# Altium PCB pay-optical-testing.PcbDoc (part 2 of 2)
Units mil, origin at the board's own origin, x right, y up, seen from the top; angles counter-clockwise.
Board outline 6000 x 4000 mil, 2 copper layers (Top Layer, Bottom Layer); 469 components, 250 nets, 1335 pads, 34 vias.
Unrouted connection lines stored in the file: 1082.
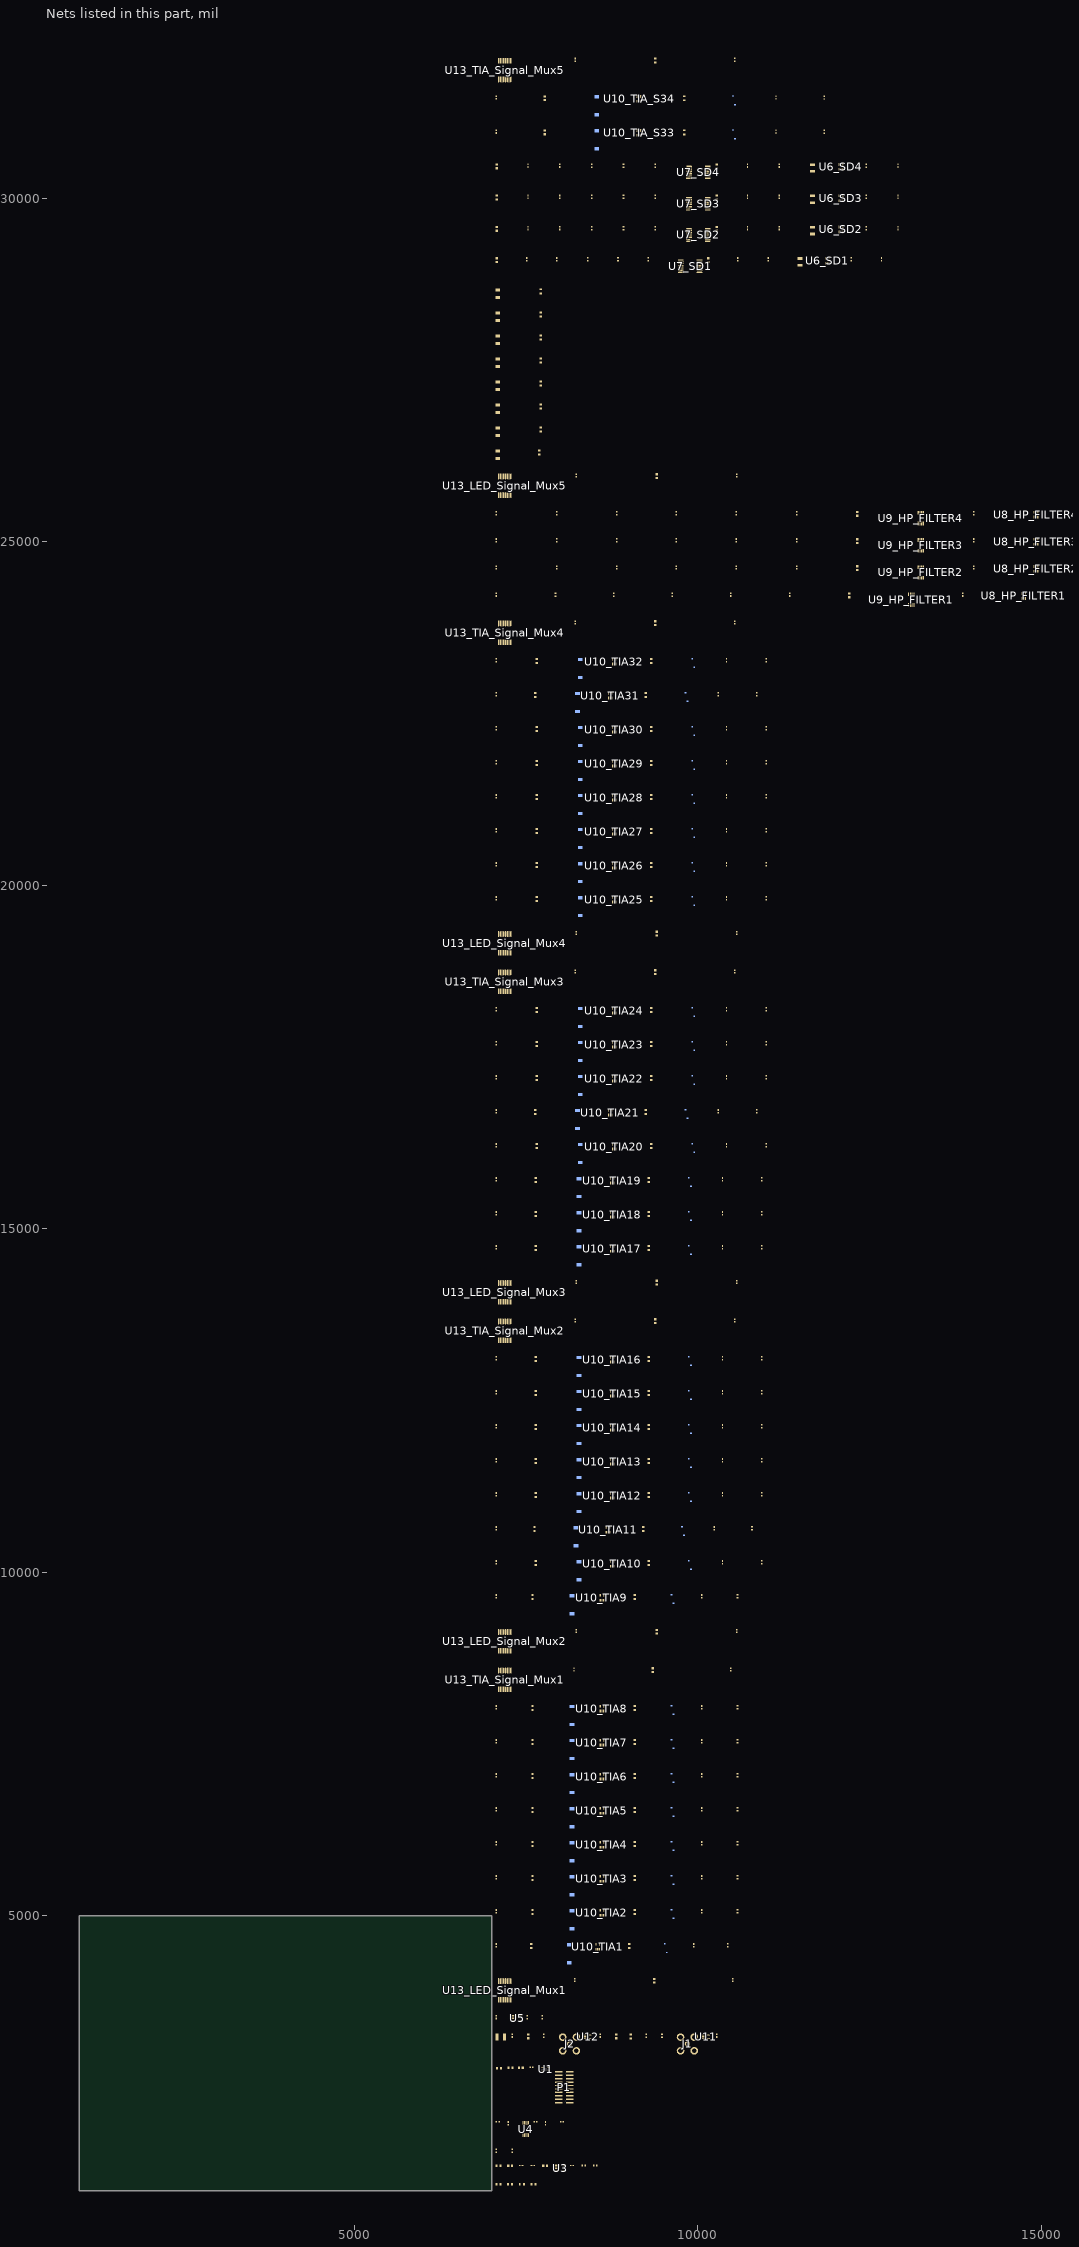
[diagram p2: the nets of this part, all layers, seen from the top]

## Components (designator, comment, footprint, x,y, rotation, side; value= is the part's Value field where it differs from the comment) (continued)
U6_SD3 "AD8613" SOP-65P200X125-5N 12060,29965 r90 top (schematic designator U6)
U6_SD4 "AD8613" SOP-65P200X125-5N 12060,30420 r90 top (schematic designator U6)
U7_SD1 "ADA2200" SSOP16_N 9890,29010 r0 top (schematic designator U7)
U7_SD2 "ADA2200" SSOP16_N 10010,29465 r0 top (schematic designator U7)
U7_SD3 "ADA2200" SSOP16_N 10010,29920 r0 top (schematic designator U7)
U7_SD4 "ADA2200" SSOP16_N 10010,30375 r0 top (schematic designator U7)
U8_HP_FILTER1 "AD8613" SOP-65P200X125-5N 14720,24175 r90 top (schematic designator U8)
U8_HP_FILTER2 "AD8613" SOP-65P200X125-5N 14900,24570 r90 top (schematic designator U8)
U8_HP_FILTER3 "AD8613" SOP-65P200X125-5N 14900,24965 r90 top (schematic designator U8)
U8_HP_FILTER4 "AD8613" SOP-65P200X125-5N 14900,25360 r90 top (schematic designator U8)
U9_HP_FILTER1 "AD8227" SOP8-65P300X300-8N 13070,24080 r90 top (schematic designator U9)
U9_HP_FILTER2 "AD8227" SOP8-65P300X300-8N 13210,24475 r90 top (schematic designator U9)
U9_HP_FILTER3 "AD8227" SOP8-65P300X300-8N 13210,24870 r90 top (schematic designator U9)
U9_HP_FILTER4 "AD8227" SOP8-65P300X300-8N 13210,25265 r90 top (schematic designator U9)
U10_TIA1 "AD8605" SOP-65P200X125-5N 8520,4515 r90 top (schematic designator U10)
U10_TIA2 "AD8605" SOP-65P200X125-5N 8580,5010 r90 top (schematic designator U10)
U10_TIA3 "AD8605" SOP-65P200X125-5N 8580,5505 r90 top (schematic designator U10)
U10_TIA4 "AD8605" SOP-65P200X125-5N 8580,6000 r90 top (schematic designator U10)
U10_TIA5 "AD8605" SOP-65P200X125-5N 8580,6495 r90 top (schematic designator U10)
U10_TIA6 "AD8605" SOP-65P200X125-5N 8580,6990 r90 top (schematic designator U10)
U10_TIA7 "AD8605" SOP-65P200X125-5N 8580,7485 r90 top (schematic designator U10)
U10_TIA8 "AD8605" SOP-65P200X125-5N 8580,7980 r90 top (schematic designator U10)
U10_TIA9 "AD8605" SOP-65P200X125-5N 8580,9595 r90 top (schematic designator U10)
U10_TIA10 "AD8605" SOP-65P200X125-5N 8730,10090 r90 top (schematic designator U10)
U10_TIA11 "AD8605" SOP-65P200X125-5N 8670,10585 r90 top (schematic designator U10)
U10_TIA12 "AD8605" SOP-65P200X125-5N 8730,11080 r90 top (schematic designator U10)
U10_TIA13 "AD8605" SOP-65P200X125-5N 8730,11575 r90 top (schematic designator U10)
U10_TIA14 "AD8605" SOP-65P200X125-5N 8730,12070 r90 top (schematic designator U10)
U10_TIA15 "AD8605" SOP-65P200X125-5N 8730,12565 r90 top (schematic designator U10)
U10_TIA16 "AD8605" SOP-65P200X125-5N 8730,13060 r90 top (schematic designator U10)
U10_TIA17 "AD8605" SOP-65P200X125-5N 8730,14675 r90 top (schematic designator U10)
U10_TIA18 "AD8605" SOP-65P200X125-5N 8730,15170 r90 top (schematic designator U10)
U10_TIA19 "AD8605" SOP-65P200X125-5N 8730,15665 r90 top (schematic designator U10)
U10_TIA20 "AD8605" SOP-65P200X125-5N 8760,16160 r90 top (schematic designator U10)
U10_TIA21 "AD8605" SOP-65P200X125-5N 8700,16655 r90 top (schematic designator U10)
U10_TIA22 "AD8605" SOP-65P200X125-5N 8760,17150 r90 top (schematic designator U10)
U10_TIA23 "AD8605" SOP-65P200X125-5N 8760,17645 r90 top (schematic designator U10)
U10_TIA24 "AD8605" SOP-65P200X125-5N 8760,18140 r90 top (schematic designator U10)
U10_TIA25 "AD8605" SOP-65P200X125-5N 8760,19755 r90 top (schematic designator U10)
U10_TIA26 "AD8605" SOP-65P200X125-5N 8760,20250 r90 top (schematic designator U10)
U10_TIA27 "AD8605" SOP-65P200X125-5N 8760,20745 r90 top (schematic designator U10)
U10_TIA28 "AD8605" SOP-65P200X125-5N 8760,21240 r90 top (schematic designator U10)
U10_TIA29 "AD8605" SOP-65P200X125-5N 8760,21735 r90 top (schematic designator U10)
U10_TIA30 "AD8605" SOP-65P200X125-5N 8760,22230 r90 top (schematic designator U10)
U10_TIA31 "AD8605" SOP-65P200X125-5N 8700,22725 r90 top (schematic designator U10)
U10_TIA32 "AD8605" SOP-65P200X125-5N 8760,23220 r90 top (schematic designator U10)
U10_TIA_S33 "AD8605" SOP-65P200X125-5N 9120,30915 r90 top (schematic designator U10)
U10_TIA_S34 "AD8605" SOP-65P200X125-5N 9120,31410 r90 top (schematic designator U10)
U11 "AD8605" SOP-65P200X125-5N 10085,3265 r0 top
U12 "AD8605" SOP-65P200X125-5N 8365,3265 r0 top
U13_LED_Signal_Mux1 "ADG658" SSOP16_N 7190,3915 r90 top (schematic designator U13)
U13_LED_Signal_Mux2 "ADG658" SSOP16_N 7190,8995 r90 top (schematic designator U13)
U13_LED_Signal_Mux3 "ADG658" SSOP16_N 7190,14075 r90 top (schematic designator U13)
U13_LED_Signal_Mux4 "ADG658" SSOP16_N 7190,19155 r90 top (schematic designator U13)
U13_LED_Signal_Mux5 "ADG658" SSOP16_N 7190,25815 r90 top (schematic designator U13)
U13_TIA_Signal_Mux1 "ADG658" SSOP16_N 7190,8435 r90 top (schematic designator U13)
U13_TIA_Signal_Mux2 "ADG658" SSOP16_N 7190,13515 r90 top (schematic designator U13)
U13_TIA_Signal_Mux3 "ADG658" SSOP16_N 7190,18595 r90 top (schematic designator U13)
U13_TIA_Signal_Mux4 "ADG658" SSOP16_N 7190,23675 r90 top (schematic designator U13)
U13_TIA_Signal_Mux5 "ADG658" SSOP16_N 7190,31865 r90 top (schematic designator U13)
Y1_SD1 "32.768kHz" ABS07-120-32.768 11490,29075 r90 top (schematic designator Y1)
Y1_SD2 "32.768kHz" ABS07-120-32.768 11670,29530 r90 top (schematic designator Y1)
Y1_SD3 "32.768kHz" ABS07-120-32.768 11670,29985 r90 top (schematic designator Y1)
Y1_SD4 "32.768kHz" ABS07-120-32.768 11670,30440 r90 top (schematic designator Y1)

## Footprints (in the part's own frame and the unit in brackets; to place one, negate y for a bottom-side part, rotate by r counter-clockwise, add the part's x,y. Pads: shape width x height; smd on the part's side, far side on the other; paste and mask are expansions set on the pad)
14-1210 [mm] "Chip Resistor, Body 3.2x2.5mm, IPC High Density"
  rect 1.1x2.6 smd: 1(-1.35,0) 2(1.35,0)
  silkscreen extent -0.4,-1.2 0.4,1.2, body extent -1.68,-1.32 1.68,1.32, height 0.9
0402#1 [mm] "Chip Capacitor, Body 1.0x0.5mm, IPC High Density"
  rect 0.6x0.5 smd: 1(-0.5,0) 2(0.5,0)
  body extent -0.55,-0.3 0.55,0.3, height 1.3
0402#2 [mm] "0402 Resistor"
  rect 0.55x0.6 smd: 1(-0.525,0) 2(0.525,0)
  silkscreen extent -0.08,-0.22 0.07,0.23
0603-LED [mm]
  rect 0.7x0.9 smd: 1(-0.75,0) 2(0.75,0)
  silkscreen extent -1.32,-0.67 1.5,0.67, body extent -0.85,-0.48 0.85,0.48, height 0.9
1608[0603] [mm] "Chip Capacitor, Body 1.6x0.8mm, IPC High Density"
  rect 0.8x0.9 smd: 1(-0.7,0) 2(0.7,0)
  body extent -0.87,-0.48 0.87,0.48, height 1.3
ABS07-120-32.768 [mm] "32.768 kHz crystal"
  rect 1x1.8 smd: 1(-1.25,0) 2(1.25,0)
  silkscreen extent -0.43,-0.86 0.43,0.86
C1206 [mm] "Chip Capacitor, Body 3.2x1.6mm, IPC High Density"
  rect 1.1x1.7 smd: 1(-1.35,0) 2(1.35,0)
  silkscreen extent -0.4,-0.75 0.4,0.75, body extent -1.7,-0.9 1.7,0.9, height 1.3
CON20_2X10_DUA00 [mil]
  rect 20x110 smd: 1(225,-80) 2(225,80) 3(175,-80) 4(175,80) 5(125,-80) 6(125,80) 7(75,-80) 8(75,80) 9(25,-80) 10(25,80) 11(-25,-80) 12(-25,80) 13(-75,-80) 14(-75,80) 15(-125,-80) 16(-125,80) 17(-175,-80) 18(-175,80) 19(-225,-80) 20(-225,80)
  round 38 / inner round 60 / far side round 38 hole 38: 21(-200,0) 22(200,0)
  silkscreen extent -255,-200 255,73, body extent 0,0 10,10, height 10
DFN220X250X80-7N [mil]
  rect 32x12 smd: 1(-45,26) 2(-45,0) 3(-45,-26) 4(45,-26) 5(45,0) 6(45,26)
  rect 30x47 smd: ""(0,0)
  silkscreen extent -86,18 -70,34
J1-0603 [mm] "Chip Resistor, Body 1.6x0.8mm, IPC High Density"
  rect 0.7x0.9 smd: 1(-0.75,0) 2(0.75,0)
  silkscreen extent -0.2,-0.35 0.2,0.35, body extent -0.85,-0.48 0.85,0.48, height 0.9
"LB P4SG" [mm] "Footprint for a reverse-mount Osram LED"
  rect 0.5x0.7 smd far side mask+0.102: 1(-1.6,-0.375) 2(1.6,0.375)
MCX5.08-H5 [mm] "Coaxial, through hole, straight."
  round 2 hole 1.2: 1(-0.002,-0.009)
  round 2.8 hole 1.7: 2(2.538,-2.549) 3(2.538,2.531) 4(-2.542,2.531) 5(-2.542,-2.549)
  silkscreen extent -3,-3.01 3,2.99
SOP8-65P300X300-8N [mm]
  rect 1.35x0.45 smd: 1(0,0) 2(0,-0.65) 3(0,-1.3) 4(0,-1.95) 5(3.95,-1.95) 6(3.95,-1.3) 7(3.95,-0.65) 8(3.95,0)
  silkscreen extent 0,-2.28 2.9,0.58
SOP10-50P300X300-10N [mm]
  rect 1.45x0.3 smd: 1(0,0) 2(0,-0.5) 3(0,-1) 4(0,-1.5) 5(0,-2) 6(4.4,-2) 7(4.4,-1.5) 8(4.4,-1) 9(4.4,-0.5) 10(4.4,0)
  silkscreen extent -0.15,-2.25 3.38,0.81
SOP-65P200X125-5N [mm]
  rect 1x0.47 smd: 1(0,0) 2(0,-0.65) 3(0,-1.3) 4(1.8,-1.3) 5(1.8,0)
  silkscreen extent -0.42,-1.85 1.8,0.57
SOT-23-5_95P290X160-5N [mm]
  rect 1.1x0.6 smd: 1(0,0) 2(0,-0.95) 3(0,-1.9) 4(2.8,-1.9) 5(2.8,0)
  silkscreen extent -0.99,-2.16 1.96,0.25
SSOP16_N [mm] "SOP, 16-Leads, Body 6.2x5.3mm, Pitch 0.65mm, IPC Medium Density"
  oval 2.1x0.45 smd: 1(-3.45,2.275) 2(-3.45,1.625) 3(-3.45,0.975) 4(-3.45,0.325) 5(-3.45,-0.325) 6(-3.45,-0.975) 7(-3.45,-1.625) 8(-3.45,-2.275) 9(3.45,-2.275) 10(3.45,-1.625) 11(3.45,-0.975) 12(3.45,-0.325) 13(3.45,0.325) 14(3.45,0.975) 15(3.45,1.625) 16(3.45,2.275)
  silkscreen extent -3.57,-3.25 2,3.25, body extent -2.7,-3.25 2.7,3.25, height 2
VBPW34SR [mm] "Silicon PIN photodiode"
  rect 1.25x1.8 smd far side: 1(-3.325,0) 2(3.325,0)
  Keep-Out Layer board cut-out: -2.25,2 2.25,2 2.25,-2 -2.25,-2

## Part data
C1 C2 C3 C4 C5 C6 C7 C8 C12_LPF_N1 C12_LPF_N2 C12_LPF_N3 C12_LPF_N4 C12_LPF_P5 C12_LPF_P6 C12_LPF_P7 C12_LPF_P8 C13 C14_SD1 C14_SD2 C14_SD3 C14_SD4 C15_SD1 C15_SD2 C15_SD3 C15_SD4 C16_SD1 C16_SD2 C16_SD3 C16_SD4 C17_SD1 C17_SD2 C17_SD3 C17_SD4 C18_SD1 C18_SD2 C18_SD3 C18_SD4 C19_SD1 C19_SD2 C19_SD3 C19_SD4 C20_SD1 C20_SD2 C20_SD3 C20_SD4 C21_HP_FILTER1 C21_HP_FILTER2 C21_HP_FILTER3 C21_HP_FILTER4 C22_HP_FILTER1 C22_HP_FILTER2 C22_HP_FILTER3 C22_HP_FILTER4 C23_HP_FILTER1 C23_HP_FILTER2 C23_HP_FILTER3 C23_HP_FILTER4 C24_HP_FILTER1 C24_HP_FILTER2 C24_HP_FILTER3 C24_HP_FILTER4 C25_HP_FILTER1 C25_HP_FILTER2 C25_HP_FILTER3 C25_HP_FILTER4 C27_TIA1 C27_TIA2 C27_TIA3 C27_TIA4 C27_TIA5 C27_TIA6 C27_TIA7 C27_TIA8 C27_TIA9 C27_TIA10 C27_TIA11 C27_TIA12 C27_TIA13 C27_TIA14 C27_TIA15 C27_TIA16 C27_TIA17 C27_TIA18 C27_TIA19 C27_TIA20 C27_TIA21 C27_TIA22 C27_TIA23 C27_TIA24 C27_TIA25 C27_TIA26 C27_TIA27 C27_TIA28 C27_TIA29 C27_TIA30 C27_TIA31 C27_TIA32 C27_TIA_S33 C27_TIA_S34 C28_TIA1 C28_TIA2 C28_TIA3 C28_TIA4 C28_TIA5 C28_TIA6 C28_TIA7 C28_TIA8 C28_TIA9 C28_TIA10 C28_TIA11 C28_TIA12 C28_TIA13 C28_TIA14 C28_TIA15 C28_TIA16 C28_TIA17 C28_TIA18 C28_TIA19 C28_TIA20 C28_TIA21 C28_TIA22 C28_TIA23 C28_TIA24 C28_TIA25 C28_TIA26 C28_TIA27 C28_TIA28 C28_TIA29 C28_TIA30 C28_TIA31 C28_TIA32 C28_TIA_S33 C28_TIA_S34 C29 C30 C31 C32 C33 C34_LED_Signal_Mux1 C34_LED_Signal_Mux2 C34_LED_Signal_Mux3 C34_LED_Signal_Mux4 C34_LED_Signal_Mux5 C34_TIA_Signal_Mux1 C34_TIA_Signal_Mux2 C34_TIA_Signal_Mux3 C34_TIA_Signal_Mux4 C34_TIA_Signal_Mux5 C35_LED_Signal_Mux1 C35_LED_Signal_Mux2 C35_LED_Signal_Mux3 C35_LED_Signal_Mux4 C35_LED_Signal_Mux5 C35_TIA_Signal_Mux1 C35_TIA_Signal_Mux2 C35_TIA_Signal_Mux3 C35_TIA_Signal_Mux4 C35_TIA_Signal_Mux5: library part "Cap Semi", "Capacitor (Semiconductor SIM Model)", LatestRevisionDate=29-May-2009, LatestRevisionNote="IPC-7351 Footprint Added.", PackageDescription="Chip Capacitor", PackageReference=C1206, Published=8-Jun-2000, Publisher="Altium Limited"
  C1 C2 C3 C4 C5 C6 C7 C8 C14_SD1 C14_SD2 C14_SD3 C14_SD4 C15_SD1 C15_SD2 C15_SD3 C15_SD4 C16_SD1 C16_SD2 C16_SD3 C16_SD4 C17_SD1 C17_SD2 C17_SD3 C17_SD4 C18_SD1 C18_SD2 C18_SD3 C18_SD4 C19_SD1 C19_SD2 C19_SD3 C19_SD4 C20_SD1 C20_SD2 C20_SD3 C20_SD4 C21_HP_FILTER1 C21_HP_FILTER2 C21_HP_FILTER3 C21_HP_FILTER4 C22_HP_FILTER1 C22_HP_FILTER2 C22_HP_FILTER3 C22_HP_FILTER4 C23_HP_FILTER1 C23_HP_FILTER2 C23_HP_FILTER3 C23_HP_FILTER4 C24_HP_FILTER1 C24_HP_FILTER2 C24_HP_FILTER3 C24_HP_FILTER4 C25_HP_FILTER1 C25_HP_FILTER2 C25_HP_FILTER3 C25_HP_FILTER4 C27_TIA1 C27_TIA2 C27_TIA3 C27_TIA4 C27_TIA5 C27_TIA6 C27_TIA7 C27_TIA8 C27_TIA9 C27_TIA10 C27_TIA11 C27_TIA12 C27_TIA13 C27_TIA14 C27_TIA15 C27_TIA16 C27_TIA17 C27_TIA18 C27_TIA19 C27_TIA20 C27_TIA21 C27_TIA22 C27_TIA23 C27_TIA24 C27_TIA25 C27_TIA26 C27_TIA27 C27_TIA28 C27_TIA29 C27_TIA30 C27_TIA31 C27_TIA32 C27_TIA_S33 C27_TIA_S34 C28_TIA1 C28_TIA2 C28_TIA3 C28_TIA4 C28_TIA5 C28_TIA6 C28_TIA7 C28_TIA8 C28_TIA9 C28_TIA10 C28_TIA11 C28_TIA12 C28_TIA13 C28_TIA14 C28_TIA15 C28_TIA16 C28_TIA17 C28_TIA18 C28_TIA19 C28_TIA20 C28_TIA21 C28_TIA22 C28_TIA23 C28_TIA24 C28_TIA25 C28_TIA26 C28_TIA27 C28_TIA28 C28_TIA29 C28_TIA30 C28_TIA31 C28_TIA32 C28_TIA_S33 C28_TIA_S34 C29 C30 C31 C32 C33 C34_LED_Signal_Mux1 C34_LED_Signal_Mux2 C34_LED_Signal_Mux3 C34_LED_Signal_Mux4 C34_LED_Signal_Mux5 C34_TIA_Signal_Mux1 C34_TIA_Signal_Mux2 C34_TIA_Signal_Mux3 C34_TIA_Signal_Mux4 C34_TIA_Signal_Mux5 C35_LED_Signal_Mux1 C35_LED_Signal_Mux2 C35_LED_Signal_Mux3 C35_LED_Signal_Mux4 C35_LED_Signal_Mux5 C35_TIA_Signal_Mux1 C35_TIA_Signal_Mux2 C35_TIA_Signal_Mux3 C35_TIA_Signal_Mux4 C35_TIA_Signal_Mux5: Supplier=Digi-Key, Supplier 1=Digi-Key
  C13: Supplier 1=Digi-Key
C9: library part "Cap Semi", "Capacitor (Semiconductor SIM Model)", Supplier Part Number=587-3807-1-ND, LatestRevisionDate=29-May-2009, LatestRevisionNote="IPC-7351 Footprint Added.", PackageDescription="Chip Capacitor", PackageReference=C1206, Published=8-Jun-2000, Publisher="Altium Limited", Supplier=Digi-Key, Supplier 1=Digi-Key
C10: library part "Cap Semi", "Capacitor (Semiconductor SIM Model)", Supplier Part Number=1276-1632-1-ND, LatestRevisionDate=29-May-2009, LatestRevisionNote="IPC-7351 Footprint Added.", PackageDescription="Chip Capacitor", PackageReference=C1206, Published=8-Jun-2000, Publisher="Altium Limited", Supplier=Digi-Key, Supplier 1=Digi-Key
C11: library part "Cap Semi", "Capacitor (Semiconductor SIM Model)", Supplier Part Number=1276-1972-1-ND, LatestRevisionDate=29-May-2009, LatestRevisionNote="IPC-7351 Footprint Added.", PackageDescription="Chip Capacitor", PackageReference=C1206, Published=8-Jun-2000, Publisher="Altium Limited", Supplier=Digi-Key, Supplier 1=Digi-Key
C26_TIA1 C26_TIA2 C26_TIA3 C26_TIA4 C26_TIA5 C26_TIA6 C26_TIA7 C26_TIA8 C26_TIA9 C26_TIA10 C26_TIA11 C26_TIA12 C26_TIA13 C26_TIA14 C26_TIA15 C26_TIA16 C26_TIA17 C26_TIA18 C26_TIA19 C26_TIA20 C26_TIA21 C26_TIA22 C26_TIA23 C26_TIA24 C26_TIA25 C26_TIA26 C26_TIA27 C26_TIA28 C26_TIA29 C26_TIA30 C26_TIA31 C26_TIA32 C26_TIA_S33 C26_TIA_S34: library part "Cap Semi", "Feedback capacitor", LatestRevisionDate=29-May-2009, LatestRevisionNote="IPC-7351 Footprint Added.", PackageDescription="Chip Capacitor", PackageReference=C1206, Published=8-Jun-2000, Publisher="Altium Limited", Supplier=Digi-Key, Supplier 1=Digi-Key
D1: library part LED2, "Typical RED, GREEN, YELLOW, AMBER GaAs LED", LatestRevisionDate=17-Jul-2002, LatestRevisionNote="Re-released for DXP Platform.", PackageDescription="SM LED; 2 Flat Leads", PackageReference=3.2X1.6X1.1, PackageVersion=Feb-2002, Published=8-Jun-2000, Publisher="Altium Limited", Supplier 1=Digi-Key
D2_TIA1 D2_TIA2 D2_TIA3 D2_TIA4 D2_TIA5 D2_TIA6 D2_TIA7 D2_TIA8 D2_TIA9 D2_TIA10 D2_TIA11 D2_TIA12 D2_TIA13 D2_TIA14 D2_TIA15 D2_TIA16 D2_TIA17 D2_TIA18 D2_TIA19 D2_TIA20 D2_TIA21 D2_TIA22 D2_TIA23 D2_TIA24 D2_TIA25 D2_TIA26 D2_TIA27 D2_TIA28 D2_TIA29 D2_TIA30 D2_TIA31 D2_TIA32 D2_TIA_S33 D2_TIA_S34: library part LED2, "Typical RED, GREEN, YELLOW, AMBER GaAs LED", Supplier Part Number=475-2814-1-ND, LatestRevisionDate=17-Jul-2002, LatestRevisionNote="Re-released for DXP Platform.", PackageDescription="SM LED; 2 Flat Leads", PackageReference=3.2X1.6X1.1, PackageVersion=Feb-2002, Published=8-Jun-2000, Publisher="Altium Limited", Supplier=Digi-Key, Supplier 1=Digi-Key
D3_TIA1 D3_TIA2 D3_TIA3 D3_TIA4 D3_TIA5 D3_TIA6 D3_TIA7 D3_TIA8 D3_TIA9 D3_TIA10 D3_TIA11 D3_TIA12 D3_TIA13 D3_TIA14 D3_TIA15 D3_TIA16 D3_TIA17 D3_TIA18 D3_TIA19 D3_TIA20 D3_TIA21 D3_TIA22 D3_TIA23 D3_TIA24 D3_TIA25 D3_TIA26 D3_TIA27 D3_TIA28 D3_TIA29 D3_TIA30 D3_TIA31 D3_TIA32 D3_TIA_S33 D3_TIA_S34: library part "Photo Sen", "Photosensitive Diode", Supplier Part Number=751-1501-1-ND, LatestRevisionDate=17-Jul-2002, LatestRevisionNote="Re-released for DXP Platform.", PackageReference=PIN2, Published=24-Mar-1999, Publisher="Altium Limited", Supplier=Digi-Key, Supplier 1=Digi-Key
J1 J2: "RF Coaxial PCB Connector, MCX; Thru-Hole, Right-Angle Mount Socket, Blunt Post Terminal, 50 Ohm Impedance", PackageDocument=04-Jul-1999, ComponentLink1Description="Manufacturer Link", ComponentLink1URL=http://www.amphenolrf.com/, DatasheetDocument=30-May-2003, DrillSize="Corresponds to nominal value.", LatestRevisionDate=15-Jul-2004, LatestRevisionNote="Component Replaced.", PackageReference=919-119J-51AX, PCB_Layout="Complies with manufacturer's recommendation.", Published=15-Jul-2004, Publisher="Altium Limited", Supplier 1=Digi-Key
P1: library part "Header 10X2", "10x2 SMD 50mil Incoming from SSM", Supplier Part Number 1=SAM11274-ND, LatestRevisionDate=17-Jul-2002, LatestRevisionNote="Re-released for DXP Platform.", Publisher="Altium Limited", Supplier 1=Digi-Key
R1: library part Res3, "Power indication LED", LatestRevisionDate=29-May-2009, LatestRevisionNote="IPC-7351 Footprint Added.", PackageDescription="Chip Resistor", PackageReference=J1-0603, Published=8-Jun-2000, Publisher="Altium Limited", Supplier 1=Digi-Key
R2: library part Res3, "10K pull-up for MUX ENn pin", LatestRevisionDate=29-May-2009, LatestRevisionNote="IPC-7351 Footprint Added.", PackageDescription="Chip Resistor", PackageReference=J1-0603, Published=8-Jun-2000, Publisher="Altium Limited"
R3 R4 R5: library part Res3, "10K pulldown on MUX channel selection", LatestRevisionDate=29-May-2009, LatestRevisionNote="IPC-7351 Footprint Added.", PackageDescription="Chip Resistor", PackageReference=J1-0603, Published=8-Jun-2000, Publisher="Altium Limited"
R6 R7 R8 R9 R10_LPF_N1 R10_LPF_N2 R10_LPF_N3 R10_LPF_N4 R10_LPF_P5 R10_LPF_P6 R10_LPF_P7 R10_LPF_P8 R11 R12 R14_SD1 R14_SD2 R14_SD3 R14_SD4 R15_SD1 R15_SD2 R15_SD3 R15_SD4 R16_SD1 R16_SD2 R16_SD3 R16_SD4 R17_HP_FILTER1 R17_HP_FILTER2 R17_HP_FILTER3 R17_HP_FILTER4 R19_HP_FILTER1 R19_HP_FILTER2 R19_HP_FILTER3 R19_HP_FILTER4 R20 R21 R22_TIA1 R22_TIA2 R22_TIA3 R22_TIA4 R22_TIA5 R22_TIA6 R22_TIA7 R22_TIA8 R22_TIA9 R22_TIA10 R22_TIA11 R22_TIA12 R22_TIA13 R22_TIA14 R22_TIA15 R22_TIA16 R22_TIA17 R22_TIA18 R22_TIA19 R22_TIA20 R22_TIA21 R22_TIA22 R22_TIA23 R22_TIA24 R22_TIA25 R22_TIA26 R22_TIA27 R22_TIA28 R22_TIA29 R22_TIA30 R22_TIA31 R22_TIA32 R22_TIA_S33 R22_TIA_S34 R24 R25 R26 R27 R28 R29_LED_Signal_Mux1 R29_LED_Signal_Mux2 R29_LED_Signal_Mux3 R29_LED_Signal_Mux4 R29_LED_Signal_Mux5 R29_TIA_Signal_Mux1 R29_TIA_Signal_Mux2 R29_TIA_Signal_Mux3 R29_TIA_Signal_Mux4 R29_TIA_Signal_Mux5: library part Res3, "Resistor", LatestRevisionDate=29-May-2009, LatestRevisionNote="IPC-7351 Footprint Added.", PackageDescription="Chip Resistor", PackageReference=J1-0603, Published=8-Jun-2000, Publisher="Altium Limited"
  R6 R7 R8 R9 R14_SD1 R14_SD2 R14_SD3 R14_SD4 R15_SD1 R15_SD2 R15_SD3 R15_SD4 R16_SD1 R16_SD2 R16_SD3 R16_SD4 R17_HP_FILTER1 R17_HP_FILTER2 R17_HP_FILTER3 R17_HP_FILTER4 R19_HP_FILTER1 R19_HP_FILTER2 R19_HP_FILTER3 R19_HP_FILTER4 R22_TIA1 R22_TIA2 R22_TIA3 R22_TIA4 R22_TIA5 R22_TIA6 R22_TIA7 R22_TIA8 R22_TIA9 R22_TIA10 R22_TIA11 R22_TIA12 R22_TIA13 R22_TIA14 R22_TIA15 R22_TIA16 R22_TIA17 R22_TIA18 R22_TIA19 R22_TIA20 R22_TIA21 R22_TIA22 R22_TIA23 R22_TIA24 R22_TIA25 R22_TIA26 R22_TIA27 R22_TIA28 R22_TIA29 R22_TIA30 R22_TIA31 R22_TIA32 R22_TIA_S33 R22_TIA_S34 R29_LED_Signal_Mux1 R29_LED_Signal_Mux2 R29_LED_Signal_Mux3 R29_LED_Signal_Mux4 R29_LED_Signal_Mux5 R29_TIA_Signal_Mux1 R29_TIA_Signal_Mux2 R29_TIA_Signal_Mux3 R29_TIA_Signal_Mux4 R29_TIA_Signal_Mux5: Supplier=Digi-Key, Supplier 1=Digi-Key
  R11 R12 R20 R21 R24 R25 R26 R27 R28: Supplier 1=Digi-Key
R13_SD1 R13_SD2 R13_SD3 R13_SD4: library part Res3, "Optional short to connect 32M1 rather than Y1", LatestRevisionDate=29-May-2009, LatestRevisionNote="IPC-7351 Footprint Added.", PackageDescription="Chip Resistor", PackageReference=J1-0603, Published=8-Jun-2000, Publisher="Altium Limited", Supplier=Digi-Key, Supplier 1=Digi-Key
R18_HP_FILTER1 R18_HP_FILTER2 R18_HP_FILTER3 R18_HP_FILTER4: library part Res3, "Optional resistor sets instrumentation amplifier gain", LatestRevisionDate=29-May-2009, LatestRevisionNote="IPC-7351 Footprint Added.", PackageDescription="Chip Resistor", PackageReference=J1-0603, Published=8-Jun-2000, Publisher="Altium Limited", Supplier 1=Digi-Key
R23_TIA1 R23_TIA2 R23_TIA3 R23_TIA4 R23_TIA5 R23_TIA6 R23_TIA7 R23_TIA8 R23_TIA9 R23_TIA10 R23_TIA11 R23_TIA12 R23_TIA13 R23_TIA14 R23_TIA15 R23_TIA16 R23_TIA17 R23_TIA18 R23_TIA19 R23_TIA20 R23_TIA21 R23_TIA22 R23_TIA23 R23_TIA24 R23_TIA25 R23_TIA26 R23_TIA27 R23_TIA28 R23_TIA29 R23_TIA30 R23_TIA31 R23_TIA32 R23_TIA_S33 R23_TIA_S34: library part Res3, "1 MOhm resistor for photodiode gain", LatestRevisionDate=29-May-2009, LatestRevisionNote="IPC-7351 Footprint Added.", PackageDescription="Chip Resistor", PackageReference=J1-0603, Published=8-Jun-2000, Publisher="Altium Limited", Supplier=Digi-Key, Supplier 1=Digi-Key
U1: "Low noise 3V low dropout regulator for analog and RF applications.", Supplier Part Number 1=296-44695-1-ND, Supplier 1=Digi-Key
U3: "2.5V reference voltage.", Supplier Part Number 1=ADR391AUJZREEL7CT-ND, Supplier=Digi-Key, Supplier 1=Digi-Key
U4: "12-bit, low-power, voltage-output DAC with internal reference.", Supplier Part Number 1=296-29022-1-ND, Supplier=Digi-Key, Supplier 1=Digi-Key
U5: "Open-drain output sub-microamp comparator.", Supplier Part Number 1=MCP6546T-E/OTCT-ND, Supplier 1=Digi-Key
U6_SD1 U6_SD2 U6_SD3 U6_SD4 U8_HP_FILTER1 U8_HP_FILTER2 U8_HP_FILTER3 U8_HP_FILTER4: "Low power, low noise rail-to-rail op-amp.", Supplier=Digi-Key, Supplier 1=Digi-Key
U7_SD1 U7_SD2 U7_SD3 U7_SD4: "Synchronous demodulator and configurable analog filter.", Supplier=Digi-Key, Supplier 1=Digi-Key
U9_HP_FILTER1 U9_HP_FILTER2 U9_HP_FILTER3 U9_HP_FILTER4: "Rail-to-rail instrumentation amplifier. Can operate on single supply.", Supplier Part Number 1=AD8227BRMZ-ND, Supplier=Digi-Key, Supplier 1=Digi-Key
U10_TIA1 U10_TIA2 U10_TIA3 U10_TIA4 U10_TIA5 U10_TIA6 U10_TIA7 U10_TIA8 U10_TIA9 U10_TIA10 U10_TIA11 U10_TIA12 U10_TIA13 U10_TIA14 U10_TIA15 U10_TIA16 U10_TIA17 U10_TIA18 U10_TIA19 U10_TIA20 U10_TIA21 U10_TIA22 U10_TIA23 U10_TIA24 U10_TIA25 U10_TIA26 U10_TIA27 U10_TIA28 U10_TIA29 U10_TIA30 U10_TIA31 U10_TIA32 U10_TIA_S33 U10_TIA_S34 U11 U12: "Low noise, precision rail-to-rail op-amp.", Supplier Part Number 1=AD8605ARTZREEL7CT-ND, Supplier=Digi-Key, Supplier 1=Digi-Key
U13_LED_Signal_Mux1 U13_LED_Signal_Mux2 U13_LED_Signal_Mux3 U13_LED_Signal_Mux4 U13_LED_Signal_Mux5 U13_TIA_Signal_Mux1 U13_TIA_Signal_Mux2 U13_TIA_Signal_Mux3 U13_TIA_Signal_Mux4 U13_TIA_Signal_Mux5: "Eight channel analog multiplexer.", Supplier Part Number 1=ADG658YRUZ-ND, Supplier=Digi-Key, Supplier 1=Digi-Key
Y1_SD1 Y1_SD2 Y1_SD3 Y1_SD4: library part XTAL, "Crystal Oscillator", Supplier Part Number=535-11937-1-ND, LatestRevisionDate=17-Jul-2002, LatestRevisionNote="Re-released for DXP Platform.", PackageDescription="Crystal, Thru-Hole; 2 Leads; Body 3.1 x 8.2 mm (Dia.xH)", PackageReference=R38, Published=8-Jun-2000, Publisher="Altium Limited", Supplier=Digi-Key, Supplier 1=Digi-Key

## Via types
v1: diameter 93, hole 82.68, Top Layer to Bottom Layer, 34 vias

## Nets (pads, with @x,y where several pads share a name; then routed paths per layer and width w, separated by ;. In a path a pad name is that pad's centre, name@x,y a point inside that pad or via, vN(x,y) a via of type N, cw(c..) or ccw(c..) an arc to the next point about the centre after c; other vN are vias at no path point)
3V: C1.2 C4.2 C5.2 C6.2 C7.2 C9.2 C10.2 C13.2 C16_SD1.2 C16_SD2.2 C16_SD3.2 C16_SD4.2 C17_SD1.2 C17_SD2.2 C17_SD3.2 C17_SD4.2 C18_SD1.1 C18_SD2.1 C18_SD3.1 C18_SD4.1 C19_SD1.2 C19_SD2.2 C19_SD3.2 C19_SD4.2 C22_HP_FILTER1.2 C22_HP_FILTER2.2 C22_HP_FILTER3.2 C22_HP_FILTER4.2 C23_HP_FILTER1.2 C23_HP_FILTER2.2 C23_HP_FILTER3.2 C23_HP_FILTER4.2 C24_HP_FILTER1.2 C24_HP_FILTER2.2 C24_HP_FILTER3.2 C24_HP_FILTER4.2 C27_TIA1.2 C27_TIA2.2 C27_TIA3.2 C27_TIA4.2 C27_TIA5.2 C27_TIA6.2 C27_TIA7.2 C27_TIA8.2 C27_TIA9.2 C27_TIA10.2 C27_TIA11.2 C27_TIA12.2 C27_TIA13.2 C27_TIA14.2 C27_TIA15.2 C27_TIA16.2 C27_TIA17.2 C27_TIA18.2 C27_TIA19.2 C27_TIA20.2 C27_TIA21.2 C27_TIA22.2 C27_TIA23.2 C27_TIA24.2 C27_TIA25.2 C27_TIA26.2 C27_TIA27.2 C27_TIA28.2 C27_TIA29.2 C27_TIA30.2 C27_TIA31.2 C27_TIA32.2 C27_TIA_S33.2 C27_TIA_S34.2 C28_TIA1.2 C28_TIA2.2 C28_TIA3.2 C28_TIA4.2 C28_TIA5.2 C28_TIA6.2 C28_TIA7.2 C28_TIA8.2 C28_TIA9.2 C28_TIA10.2 C28_TIA11.2 C28_TIA12.2 C28_TIA13.2 C28_TIA14.2 C28_TIA15.2 C28_TIA16.2 C28_TIA17.2 C28_TIA18.2 C28_TIA19.2 C28_TIA20.2 C28_TIA21.2 C28_TIA22.2 C28_TIA23.2 C28_TIA24.2 C28_TIA25.2 C28_TIA26.2 C28_TIA27.2 C28_TIA28.2 C28_TIA29.2 C28_TIA30.2 C28_TIA31.2 C28_TIA32.2 C28_TIA_S33.2 C28_TIA_S34.2 C30.2 C31.2 C32.2 C33.2 C34_LED_Signal_Mux1.2 C34_LED_Signal_Mux2.2 C34_LED_Signal_Mux3.2 C34_LED_Signal_Mux4.2 C34_LED_Signal_Mux5.2 C34_TIA_Signal_Mux1.2 C34_TIA_Signal_Mux2.2 C34_TIA_Signal_Mux3.2 C34_TIA_Signal_Mux4.2 C34_TIA_Signal_Mux5.2 C35_LED_Signal_Mux1.2 C35_LED_Signal_Mux2.2 C35_LED_Signal_Mux3.2 C35_LED_Signal_Mux4.2 C35_LED_Signal_Mux5.2 C35_TIA_Signal_Mux1.2 C35_TIA_Signal_Mux2.2 C35_TIA_Signal_Mux3.2 C35_TIA_Signal_Mux4.2 C35_TIA_Signal_Mux5.2 R2.2 R8.2 R9.2 R11.2 R12.2 R14_SD1.1 R14_SD2.1 R14_SD3.1 R14_SD4.1 R15_SD1.2 R15_SD2.2 R15_SD3.2 R15_SD4.2 R16_SD1.2 R16_SD2.2 R16_SD3.2 R16_SD4.2 R29_LED_Signal_Mux1.2 R29_LED_Signal_Mux2.2 R29_LED_Signal_Mux3.2 R29_LED_Signal_Mux4.2 R29_LED_Signal_Mux5.2 R29_TIA_Signal_Mux1.2 R29_TIA_Signal_Mux2.2 R29_TIA_Signal_Mux3.2 R29_TIA_Signal_Mux4.2 R29_TIA_Signal_Mux5.2 U1.1 U3.1 U3.2 U4.9 U5.5 U6_SD1.5 U6_SD2.5 U6_SD3.5 U6_SD4.5 U7_SD1.12 U7_SD2.12 U7_SD3.12 U7_SD4.12 U8_HP_FILTER1.5 U8_HP_FILTER2.5 U8_HP_FILTER3.5 U8_HP_FILTER4.5 U9_HP_FILTER1.8 U9_HP_FILTER2.8 U9_HP_FILTER3.8 U9_HP_FILTER4.8 U10_TIA1.5 U10_TIA2.5 U10_TIA3.5 U10_TIA4.5 U10_TIA5.5 U10_TIA6.5 U10_TIA7.5 U10_TIA8.5 U10_TIA9.5 U10_TIA10.5 U10_TIA11.5 U10_TIA12.5 U10_TIA13.5 U10_TIA14.5 U10_TIA15.5 U10_TIA16.5 U10_TIA17.5 U10_TIA18.5 U10_TIA19.5 U10_TIA20.5 U10_TIA21.5 U10_TIA22.5 U10_TIA23.5 U10_TIA24.5 U10_TIA25.5 U10_TIA26.5 U10_TIA27.5 U10_TIA28.5 U10_TIA29.5 U10_TIA30.5 U10_TIA31.5 U10_TIA32.5 U10_TIA_S33.5 U10_TIA_S34.5 U11.5 U12.5 U13_LED_Signal_Mux1.16 U13_LED_Signal_Mux2.16 U13_LED_Signal_Mux3.16 U13_LED_Signal_Mux4.16 U13_LED_Signal_Mux5.16 U13_TIA_Signal_Mux1.16 U13_TIA_Signal_Mux2.16 U13_TIA_Signal_Mux3.16 U13_TIA_Signal_Mux4.16 U13_TIA_Signal_Mux5.16
3V3: C2.2 C3.2 P1.1 P1.20 R1.2 R6.2 R7.2 U1.6
ADC_CSn_1: P1.14 R6.1
ADC_SYNCn_1: P1.16 R7.1
AGND: C3.1 C4.1 C5.1 C6.1 C7.1 C8.1 C27_TIA1.1 C27_TIA2.1 C27_TIA3.1 C27_TIA4.1 C27_TIA5.1 C27_TIA6.1 C27_TIA7.1 C27_TIA8.1 C27_TIA9.1 C27_TIA10.1 C27_TIA11.1 C27_TIA12.1 C27_TIA13.1 C27_TIA14.1 C27_TIA15.1 C27_TIA16.1 C27_TIA17.1 C27_TIA18.1 C27_TIA19.1 C27_TIA20.1 C27_TIA21.1 C27_TIA22.1 C27_TIA23.1 C27_TIA24.1 C27_TIA25.1 C27_TIA26.1 C27_TIA27.1 C27_TIA28.1 C27_TIA29.1 C27_TIA30.1 C27_TIA31.1 C27_TIA32.1 C27_TIA_S33.1 C27_TIA_S34.1 C28_TIA1.1 C28_TIA2.1 C28_TIA3.1 C28_TIA4.1 C28_TIA5.1 C28_TIA6.1 C28_TIA7.1 C28_TIA8.1 C28_TIA9.1 C28_TIA10.1 C28_TIA11.1 C28_TIA12.1 C28_TIA13.1 C28_TIA14.1 C28_TIA15.1 C28_TIA16.1 C28_TIA17.1 C28_TIA18.1 C28_TIA19.1 C28_TIA20.1 C28_TIA21.1 C28_TIA22.1 C28_TIA23.1 C28_TIA24.1 C28_TIA25.1 C28_TIA26.1 C28_TIA27.1 C28_TIA28.1 C28_TIA29.1 C28_TIA30.1 C28_TIA31.1 C28_TIA32.1 C28_TIA_S33.1 C28_TIA_S34.1 D2_TIA1.2 D2_TIA2.2 D2_TIA3.2 D2_TIA4.2 D2_TIA5.2 D2_TIA6.2 D2_TIA7.2 D2_TIA8.2 D2_TIA9.2 D2_TIA10.2 D2_TIA11.2 D2_TIA12.2 D2_TIA13.2 D2_TIA14.2 D2_TIA15.2 D2_TIA16.2 D2_TIA17.2 D2_TIA18.2 D2_TIA19.2 D2_TIA20.2 D2_TIA21.2 D2_TIA22.2 D2_TIA23.2 D2_TIA24.2 D2_TIA25.2 D2_TIA26.2 D2_TIA27.2 D2_TIA28.2 D2_TIA29.2 D2_TIA30.2 D2_TIA31.2 D2_TIA32.2 D2_TIA_S33.2 D2_TIA_S34.2 D3_TIA1.1 D3_TIA2.1 D3_TIA3.1 D3_TIA4.1 D3_TIA5.1 D3_TIA6.1 D3_TIA7.1 D3_TIA8.1 D3_TIA9.1 D3_TIA10.1 D3_TIA11.1 D3_TIA12.1 D3_TIA13.1 D3_TIA14.1 D3_TIA15.1 D3_TIA16.1 D3_TIA17.1 D3_TIA18.1 D3_TIA19.1 D3_TIA20.1 D3_TIA21.1 D3_TIA22.1 D3_TIA23.1 D3_TIA24.1 D3_TIA25.1 D3_TIA26.1 D3_TIA27.1 D3_TIA28.1 D3_TIA29.1 D3_TIA30.1 D3_TIA31.1 D3_TIA32.1 D3_TIA_S33.1 D3_TIA_S34.1 U3.5 U10_TIA1.2 U10_TIA1.3 U10_TIA2.2 U10_TIA2.3 U10_TIA3.2 U10_TIA3.3 U10_TIA4.2 U10_TIA4.3 U10_TIA5.2 U10_TIA5.3 U10_TIA6.2 U10_TIA6.3 U10_TIA7.2 U10_TIA7.3 U10_TIA8.2 U10_TIA8.3 U10_TIA9.2 U10_TIA9.3 U10_TIA10.2 U10_TIA10.3 U10_TIA11.2 U10_TIA11.3 U10_TIA12.2 U10_TIA12.3 U10_TIA13.2 U10_TIA13.3 U10_TIA14.2 U10_TIA14.3 U10_TIA15.2 U10_TIA15.3 U10_TIA16.2 U10_TIA16.3 U10_TIA17.2 U10_TIA17.3 U10_TIA18.2 U10_TIA18.3 U10_TIA19.2 U10_TIA19.3 U10_TIA20.2 U10_TIA20.3 U10_TIA21.2 U10_TIA21.3 U10_TIA22.2 U10_TIA22.3 U10_TIA23.2 U10_TIA23.3 U10_TIA24.2 U10_TIA24.3 U10_TIA25.2 U10_TIA25.3 U10_TIA26.2 U10_TIA26.3 U10_TIA27.2 U10_TIA27.3 U10_TIA28.2 U10_TIA28.3 U10_TIA29.2 U10_TIA29.3 U10_TIA30.2 U10_TIA30.3 U10_TIA31.2 U10_TIA31.3 U10_TIA32.2 U10_TIA32.3 U10_TIA_S33.2 U10_TIA_S33.3 U10_TIA_S34.2 U10_TIA_S34.3
AIN1/P3: R2.1 R29_LED_Signal_Mux1.1 R29_LED_Signal_Mux2.1 R29_LED_Signal_Mux3.1 R29_TIA_Signal_Mux1.1 R29_TIA_Signal_Mux2.1 R29_TIA_Signal_Mux3.1 U5.4 U13_LED_Signal_Mux1.6 U13_LED_Signal_Mux2.6 U13_LED_Signal_Mux3.6 U13_TIA_Signal_Mux1.6 U13_TIA_Signal_Mux2.6 U13_TIA_Signal_Mux3.6
AIN2/P2: R3.2 U13_LED_Signal_Mux1.9 U13_LED_Signal_Mux2.9 U13_LED_Signal_Mux3.9 U13_LED_Signal_Mux4.9 U13_LED_Signal_Mux5.9 U13_TIA_Signal_Mux1.9 U13_TIA_Signal_Mux2.9 U13_TIA_Signal_Mux3.9 U13_TIA_Signal_Mux4.9 U13_TIA_Signal_Mux5.9
AIN3/P1: R4.2 U13_LED_Signal_Mux1.10 U13_LED_Signal_Mux2.10 U13_LED_Signal_Mux3.10 U13_LED_Signal_Mux4.10 U13_LED_Signal_Mux5.10 U13_TIA_Signal_Mux1.10 U13_TIA_Signal_Mux2.10 U13_TIA_Signal_Mux3.10 U13_TIA_Signal_Mux4.10 U13_TIA_Signal_Mux5.10
AIN4/P0: R5.2 U13_LED_Signal_Mux1.11 U13_LED_Signal_Mux2.11 U13_LED_Signal_Mux3.11 U13_LED_Signal_Mux4.11 U13_LED_Signal_Mux5.11 U13_TIA_Signal_Mux1.11 U13_TIA_Signal_Mux2.11 U13_TIA_Signal_Mux3.11 U13_TIA_Signal_Mux4.11 U13_TIA_Signal_Mux5.11
AIN13: 
AIN14: 
AIN15: U4.1
AIN16: U4.2
CH4_ENn_6: R11.1 R29_LED_Signal_Mux4.1 R29_TIA_Signal_Mux4.1 U5.1 U13_LED_Signal_Mux4.6 U13_TIA_Signal_Mux4.6
DAC_CLRn: R9.1 U4.5
DAC_CSn_1: P1.12 R8.1 U4.6
FL_LED1_CH1: R22_TIA1.1 U13_LED_Signal_Mux1.13
FL_LED1_CH2: R22_TIA9.1 U13_LED_Signal_Mux2.13
FL_LED1_CH3: R22_TIA17.1 U13_LED_Signal_Mux3.13
FL_LED1_CH4: R22_TIA25.1 U13_LED_Signal_Mux4.13
FL_LED2_CH1: R22_TIA2.1 U13_LED_Signal_Mux1.14
FL_LED2_CH2: R22_TIA10.1 U13_LED_Signal_Mux2.14
FL_LED2_CH3: R22_TIA18.1 U13_LED_Signal_Mux3.14
FL_LED2_CH4: R22_TIA26.1 U13_LED_Signal_Mux4.14
FL_LED3_CH1: R22_TIA3.1 U13_LED_Signal_Mux1.15
FL_LED3_CH2: R22_TIA11.1 U13_LED_Signal_Mux2.15
FL_LED3_CH3: R22_TIA19.1 U13_LED_Signal_Mux3.15
FL_LED3_CH4: R22_TIA27.1 U13_LED_Signal_Mux4.15
FL_LED4_CH1: R22_TIA4.1 U13_LED_Signal_Mux1.12
FL_LED4_CH2: R22_TIA12.1 U13_LED_Signal_Mux2.12
FL_LED4_CH3: R22_TIA20.1 U13_LED_Signal_Mux3.12
FL_LED4_CH4: R22_TIA28.1 U13_LED_Signal_Mux4.12
FL_LED5_CH1: R22_TIA5.1 U13_LED_Signal_Mux1.1
FL_LED5_CH2: R22_TIA13.1 U13_LED_Signal_Mux2.1
FL_LED5_CH3: R22_TIA21.1 U13_LED_Signal_Mux3.1
FL_LED5_CH4: R22_TIA29.1 U13_LED_Signal_Mux4.1
FL_LED6_CH1: R22_TIA6.1 U13_LED_Signal_Mux1.5
FL_LED6_CH2: R22_TIA14.1 U13_LED_Signal_Mux2.5
FL_LED6_CH3: R22_TIA22.1 U13_LED_Signal_Mux3.5
FL_LED6_CH4: R22_TIA30.1 U13_LED_Signal_Mux4.5
FL_LED7_CH1: R22_TIA7.1 U13_LED_Signal_Mux1.2
FL_LED7_CH2: R22_TIA15.1 U13_LED_Signal_Mux2.2
FL_LED7_CH3: R22_TIA23.1 U13_LED_Signal_Mux3.2
FL_LED7_CH4: R22_TIA31.1 U13_LED_Signal_Mux4.2
FL_LED8_CH1: R22_TIA8.1 U13_LED_Signal_Mux1.4
FL_LED8_CH2: R22_TIA16.1 U13_LED_Signal_Mux2.4
FL_LED8_CH3: R22_TIA24.1 U13_LED_Signal_Mux3.4
FL_LED8_CH4: R22_TIA32.1 U13_LED_Signal_Mux4.4
GND: C1.1 C2.1 C9.1 C10.1 C11.2 C12_LPF_N1.1 C12_LPF_N2.1 C12_LPF_N3.1 C12_LPF_N4.1 C12_LPF_P5.1 C12_LPF_P6.1 C12_LPF_P7.1 C12_LPF_P8.1 C13.1 C14_SD1.2 C14_SD2.2 C14_SD3.2 C14_SD4.2 C15_SD1.2 C15_SD2.2 C15_SD3.2 C15_SD4.2 C16_SD1.1 C16_SD2.1 C16_SD3.1 C16_SD4.1 C17_SD1.1 C17_SD2.1 C17_SD3.1 C17_SD4.1 C18_SD1.2 C18_SD2.2 C18_SD3.2 C18_SD4.2 C19_SD1.1 C19_SD2.1 C19_SD3.1 C19_SD4.1 C20_SD1.1 C20_SD2.1 C20_SD3.1 C20_SD4.1 C22_HP_FILTER1.1 C22_HP_FILTER2.1 C22_HP_FILTER3.1 C22_HP_FILTER4.1 C23_HP_FILTER1.1 C23_HP_FILTER2.1 C23_HP_FILTER3.1 C23_HP_FILTER4.1 C24_HP_FILTER1.1 C24_HP_FILTER2.1 C24_HP_FILTER3.1 C24_HP_FILTER4.1 C25_HP_FILTER1.1 C25_HP_FILTER2.1 C25_HP_FILTER3.1 C25_HP_FILTER4.1 C29.2 C30.1 C31.1 C32.1 C33.1 C34_LED_Signal_Mux1.1 C34_LED_Signal_Mux2.1 C34_LED_Signal_Mux3.1 C34_LED_Signal_Mux4.1 C34_LED_Signal_Mux5.1 C34_TIA_Signal_Mux1.1 C34_TIA_Signal_Mux2.1 C34_TIA_Signal_Mux3.1 C34_TIA_Signal_Mux4.1 C34_TIA_Signal_Mux5.1 C35_LED_Signal_Mux1.1 C35_LED_Signal_Mux2.1 C35_LED_Signal_Mux3.1 C35_LED_Signal_Mux4.1 C35_LED_Signal_Mux5.1 C35_TIA_Signal_Mux1.1 C35_TIA_Signal_Mux2.1 C35_TIA_Signal_Mux3.1 C35_TIA_Signal_Mux4.1 C35_TIA_Signal_Mux5.1 D1.2 J1.2 J1.3 J1.4 J1.5 J2.2 J2.3 J2.4 J2.5 P1.2 P1.19 R3.1 R4.1 R5.1 R17_HP_FILTER1.1 R17_HP_FILTER2.1 R17_HP_FILTER3.1 R17_HP_FILTER4.1 R20.1 R21.1 R26.1 R28.1 U1.3 U1.4 U4.3 U4.4 U5.2 U6_SD1.2 U6_SD2.2 U6_SD3.2 U6_SD4.2 U7_SD1.5 U7_SD2.5 U7_SD3.5 U7_SD4.5 U8_HP_FILTER1.2 U8_HP_FILTER2.2 U8_HP_FILTER3.2 U8_HP_FILTER4.2 U9_HP_FILTER1.1 U9_HP_FILTER1.5 U9_HP_FILTER2.1 U9_HP_FILTER2.5 U9_HP_FILTER3.1 U9_HP_FILTER3.5 U9_HP_FILTER4.1 U9_HP_FILTER4.5 U11.2 U12.2 U13_LED_Signal_Mux1.7 U13_LED_Signal_Mux1.8 U13_LED_Signal_Mux2.7 U13_LED_Signal_Mux2.8 U13_LED_Signal_Mux3.7 U13_LED_Signal_Mux3.8 U13_LED_Signal_Mux4.7 U13_LED_Signal_Mux4.8 U13_LED_Signal_Mux5.7 U13_LED_Signal_Mux5.8 U13_TIA_Signal_Mux1.7 U13_TIA_Signal_Mux1.8 U13_TIA_Signal_Mux2.7 U13_TIA_Signal_Mux2.8 U13_TIA_Signal_Mux3.7 U13_TIA_Signal_Mux3.8 U13_TIA_Signal_Mux4.7 U13_TIA_Signal_Mux4.8 U13_TIA_Signal_Mux5.7 U13_TIA_Signal_Mux5.8
LED_Sig1: U6_SD1.1 U6_SD1.4 U13_LED_Signal_Mux1.3
LED_Sig2: U6_SD2.1 U6_SD2.4 U13_LED_Signal_Mux2.3
LED_Sig3: U6_SD3.1 U6_SD3.4 U13_LED_Signal_Mux3.3
LED_Sig4: U6_SD4.1 U6_SD4.4 U13_LED_Signal_Mux4.3 U13_LED_Signal_Mux5.3
LPF_N1: C12_LPF_N1.2 R10_LPF_N1.2
LPF_N2: C12_LPF_N2.2 R10_LPF_N2.2
LPF_N3: C12_LPF_N3.2 R10_LPF_N3.2
LPF_N4: C12_LPF_N4.2 R10_LPF_N4.2
LPF_P1: C12_LPF_P5.2 R10_LPF_P5.2
LPF_P2: C12_LPF_P6.2 R10_LPF_P6.2
LPF_P3: C12_LPF_P7.2 R10_LPF_P7.2
LPF_P4: C12_LPF_P8.2 R10_LPF_P8.2
MISO: P1.4
MOSI: P1.6 U4.8 U7_SD1.14 U7_SD2.14 U7_SD3.14 U7_SD4.14
MUX_5_EN_1: P1.10 R12.1 R29_LED_Signal_Mux5.1 R29_TIA_Signal_Mux5.1 U5.3 U13_LED_Signal_Mux5.6 U13_TIA_Signal_Mux5.6
NetC8_2: C8.2 U3.3 U3.4
NetC11_1: C11.1 U4.10
NetC14_SD1_1: C14_SD1.1 R13_SD1.1 U7_SD1.1 Y1_SD1.2
NetC14_SD2_1: C14_SD2.1 R13_SD2.1 U7_SD2.1 Y1_SD2.2
NetC14_SD3_1: C14_SD3.1 R13_SD3.1 U7_SD3.1 Y1_SD3.2
NetC14_SD4_1: C14_SD4.1 R13_SD4.1 U7_SD4.1 Y1_SD4.2
NetC15_SD1_1: C15_SD1.1 U7_SD1.16 Y1_SD1.1
NetC15_SD2_1: C15_SD2.1 U7_SD2.16 Y1_SD2.1
NetC15_SD3_1: C15_SD3.1 U7_SD3.16 Y1_SD3.1
NetC15_SD4_1: C15_SD4.1 U7_SD4.16 Y1_SD4.1
NetC21_HP_FILTER1_1: C21_HP_FILTER1.1 R17_HP_FILTER1.2 U9_HP_FILTER1.4
NetC21_HP_FILTER2_1: C21_HP_FILTER2.1 R17_HP_FILTER2.2 U9_HP_FILTER2.4
NetC21_HP_FILTER3_1: C21_HP_FILTER3.1 R17_HP_FILTER3.2 U9_HP_FILTER3.4
NetC21_HP_FILTER4_1: C21_HP_FILTER4.1 R17_HP_FILTER4.2 U9_HP_FILTER4.4
NetC26_TIA1_1: C26_TIA1.1 D3_TIA1.2 R23_TIA1.1 U10_TIA1.4
NetC26_TIA2_1: C26_TIA2.1 D3_TIA2.2 R23_TIA2.1 U10_TIA2.4
NetC26_TIA3_1: C26_TIA3.1 D3_TIA3.2 R23_TIA3.1 U10_TIA3.4
NetC26_TIA4_1: C26_TIA4.1 D3_TIA4.2 R23_TIA4.1 U10_TIA4.4
NetC26_TIA5_1: C26_TIA5.1 D3_TIA5.2 R23_TIA5.1 U10_TIA5.4
NetC26_TIA6_1: C26_TIA6.1 D3_TIA6.2 R23_TIA6.1 U10_TIA6.4
NetC26_TIA7_1: C26_TIA7.1 D3_TIA7.2 R23_TIA7.1 U10_TIA7.4
NetC26_TIA8_1: C26_TIA8.1 D3_TIA8.2 R23_TIA8.1 U10_TIA8.4
NetC26_TIA9_1: C26_TIA9.1 D3_TIA9.2 R23_TIA9.1 U10_TIA9.4
NetC26_TIA10_1: C26_TIA10.1 D3_TIA10.2 R23_TIA10.1 U10_TIA10.4
NetC26_TIA11_1: C26_TIA11.1 D3_TIA11.2 R23_TIA11.1 U10_TIA11.4
NetC26_TIA12_1: C26_TIA12.1 D3_TIA12.2 R23_TIA12.1 U10_TIA12.4
NetC26_TIA13_1: C26_TIA13.1 D3_TIA13.2 R23_TIA13.1 U10_TIA13.4
NetC26_TIA14_1: C26_TIA14.1 D3_TIA14.2 R23_TIA14.1 U10_TIA14.4
NetC26_TIA15_1: C26_TIA15.1 D3_TIA15.2 R23_TIA15.1 U10_TIA15.4
NetC26_TIA16_1: C26_TIA16.1 D3_TIA16.2 R23_TIA16.1 U10_TIA16.4
NetC26_TIA17_1: C26_TIA17.1 D3_TIA17.2 R23_TIA17.1 U10_TIA17.4
NetC26_TIA18_1: C26_TIA18.1 D3_TIA18.2 R23_TIA18.1 U10_TIA18.4
NetC26_TIA19_1: C26_TIA19.1 D3_TIA19.2 R23_TIA19.1 U10_TIA19.4
NetC26_TIA20_1: C26_TIA20.1 D3_TIA20.2 R23_TIA20.1 U10_TIA20.4
NetC26_TIA21_1: C26_TIA21.1 D3_TIA21.2 R23_TIA21.1 U10_TIA21.4
NetC26_TIA22_1: C26_TIA22.1 D3_TIA22.2 R23_TIA22.1 U10_TIA22.4
NetC26_TIA23_1: C26_TIA23.1 D3_TIA23.2 R23_TIA23.1 U10_TIA23.4
NetC26_TIA24_1: C26_TIA24.1 D3_TIA24.2 R23_TIA24.1 U10_TIA24.4
NetC26_TIA25_1: C26_TIA25.1 D3_TIA25.2 R23_TIA25.1 U10_TIA25.4
NetC26_TIA26_1: C26_TIA26.1 D3_TIA26.2 R23_TIA26.1 U10_TIA26.4
NetC26_TIA27_1: C26_TIA27.1 D3_TIA27.2 R23_TIA27.1 U10_TIA27.4
NetC26_TIA28_1: C26_TIA28.1 D3_TIA28.2 R23_TIA28.1 U10_TIA28.4
NetC26_TIA29_1: C26_TIA29.1 D3_TIA29.2 R23_TIA29.1 U10_TIA29.4
NetC26_TIA30_1: C26_TIA30.1 D3_TIA30.2 R23_TIA30.1 U10_TIA30.4
NetC26_TIA31_1: C26_TIA31.1 D3_TIA31.2 R23_TIA31.1 U10_TIA31.4
NetC26_TIA32_1: C26_TIA32.1 D3_TIA32.2 R23_TIA32.1 U10_TIA32.4
NetC26_TIA_S33_1: C26_TIA_S33.1 D3_TIA_S33.2 R23_TIA_S33.1 U10_TIA_S33.4
NetC26_TIA_S34_1: C26_TIA_S34.1 D3_TIA_S34.2 R23_TIA_S34.1 U10_TIA_S34.4
NetD1_1: D1.1 R1.1
NetD2_TIA1_1: D2_TIA1.1 R22_TIA1.2
NetD2_TIA2_1: D2_TIA2.1 R22_TIA2.2
NetD2_TIA3_1: D2_TIA3.1 R22_TIA3.2
NetD2_TIA4_1: D2_TIA4.1 R22_TIA4.2
NetD2_TIA5_1: D2_TIA5.1 R22_TIA5.2
NetD2_TIA6_1: D2_TIA6.1 R22_TIA6.2
NetD2_TIA7_1: D2_TIA7.1 R22_TIA7.2
NetD2_TIA8_1: D2_TIA8.1 R22_TIA8.2
NetD2_TIA9_1: D2_TIA9.1 R22_TIA9.2
NetD2_TIA10_1: D2_TIA10.1 R22_TIA10.2
NetD2_TIA11_1: D2_TIA11.1 R22_TIA11.2
NetD2_TIA12_1: D2_TIA12.1 R22_TIA12.2
NetD2_TIA13_1: D2_TIA13.1 R22_TIA13.2
NetD2_TIA14_1: D2_TIA14.1 R22_TIA14.2
NetD2_TIA15_1: D2_TIA15.1 R22_TIA15.2
NetD2_TIA16_1: D2_TIA16.1 R22_TIA16.2
NetD2_TIA17_1: D2_TIA17.1 R22_TIA17.2
NetD2_TIA18_1: D2_TIA18.1 R22_TIA18.2
NetD2_TIA19_1: D2_TIA19.1 R22_TIA19.2
NetD2_TIA20_1: D2_TIA20.1 R22_TIA20.2
NetD2_TIA21_1: D2_TIA21.1 R22_TIA21.2
NetD2_TIA22_1: D2_TIA22.1 R22_TIA22.2
NetD2_TIA23_1: D2_TIA23.1 R22_TIA23.2
NetD2_TIA24_1: D2_TIA24.1 R22_TIA24.2
NetD2_TIA25_1: D2_TIA25.1 R22_TIA25.2
NetD2_TIA26_1: D2_TIA26.1 R22_TIA26.2
NetD2_TIA27_1: D2_TIA27.1 R22_TIA27.2
NetD2_TIA28_1: D2_TIA28.1 R22_TIA28.2
NetD2_TIA29_1: D2_TIA29.1 R22_TIA29.2
NetD2_TIA30_1: D2_TIA30.1 R22_TIA30.2
NetD2_TIA31_1: D2_TIA31.1 R22_TIA31.2
NetD2_TIA32_1: D2_TIA32.1 R22_TIA32.2
NetD2_TIA_S33_1: D2_TIA_S33.1 R22_TIA_S33.2
NetD2_TIA_S34_1: D2_TIA_S34.1 R22_TIA_S34.2
NetJ1_1: J1.1 R24.1
NetJ2_1: J2.1 R27.2
NetR15_SD1_1: R15_SD1.1 U7_SD1.9
NetR15_SD2_1: R15_SD2.1 U7_SD2.9
NetR15_SD3_1: R15_SD3.1 U7_SD3.9
NetR15_SD4_1: R15_SD4.1 U7_SD4.9
NetR16_SD1_1: R16_SD1.1 U7_SD1.4
NetR16_SD2_1: R16_SD2.1 U7_SD2.4
NetR16_SD3_1: R16_SD3.1 U7_SD3.4
NetR16_SD4_1: R16_SD4.1 U7_SD4.4
NetR18_HP_FILTER1_1: R18_HP_FILTER1.1 U9_HP_FILTER1.3
NetR18_HP_FILTER1_2: R18_HP_FILTER1.2 U9_HP_FILTER1.2
NetR18_HP_FILTER2_1: R18_HP_FILTER2.1 U9_HP_FILTER2.3
NetR18_HP_FILTER2_2: R18_HP_FILTER2.2 U9_HP_FILTER2.2
NetR18_HP_FILTER3_1: R18_HP_FILTER3.1 U9_HP_FILTER3.3
NetR18_HP_FILTER3_2: R18_HP_FILTER3.2 U9_HP_FILTER3.2
NetR18_HP_FILTER4_1: R18_HP_FILTER4.1 U9_HP_FILTER4.3
NetR18_HP_FILTER4_2: R18_HP_FILTER4.2 U9_HP_FILTER4.2
NetR19_HP_FILTER1_1: R19_HP_FILTER1.1 U9_HP_FILTER1.7
NetR19_HP_FILTER2_1: R19_HP_FILTER2.1 U9_HP_FILTER2.7
NetR19_HP_FILTER3_1: R19_HP_FILTER3.1 U9_HP_FILTER3.7
NetR19_HP_FILTER4_1: R19_HP_FILTER4.1 U9_HP_FILTER4.7
NetR24_2: R24.2 U11.3
NetR25_1: R25.1 R26.2 U12.4
NetR27_1: R27.1 R28.2 U12.3
RCLK/SDO_SD1: U6_SD1.3 U7_SD1.13
RCLK/SDO_SD2: U6_SD2.3 U7_SD2.13
RCLK/SDO_SD3: U6_SD3.3 U7_SD3.13
RCLK/SDO_SD4: U6_SD4.3 U7_SD4.13
REF_HP_FILTER1: U8_HP_FILTER1.1 U8_HP_FILTER1.4 U9_HP_FILTER1.6
REF_HP_FILTER2: U8_HP_FILTER2.1 U8_HP_FILTER2.4 U9_HP_FILTER2.6
REF_HP_FILTER3: U8_HP_FILTER3.1 U8_HP_FILTER3.4 U9_HP_FILTER3.6
REF_HP_FILTER4: U8_HP_FILTER4.1 U8_HP_FILTER4.4 U9_HP_FILTER4.6
REFSigO1: C20_SD1.2 U7_SD1.7 U7_SD1.8 U8_HP_FILTER1.3
REFSigO2: C20_SD2.2 U7_SD2.7 U7_SD2.8 U8_HP_FILTER2.3
REFSigO3: C20_SD3.2 U7_SD3.7 U7_SD3.8 U8_HP_FILTER3.3
REFSigO4: C20_SD4.2 U7_SD4.7 U7_SD4.8 U8_HP_FILTER4.3
S3_LED_Signal_Mux5: U11.1 U11.4 U13_LED_Signal_Mux5.15
S3_TIA_Signal_Mux5: R21.2 U13_TIA_Signal_Mux5.1 U13_TIA_Signal_Mux5.2 U13_TIA_Signal_Mux5.4 U13_TIA_Signal_Mux5.5 U13_TIA_Signal_Mux5.12 U13_TIA_Signal_Mux5.15
S4_LED_Signal_Mux5: C29.1 R25.2 U12.1 U13_LED_Signal_Mux5.12
S5_LED_Signal_Mux5: R20.2 U13_LED_Signal_Mux5.1 U13_LED_Signal_Mux5.2 U13_LED_Signal_Mux5.4 U13_LED_Signal_Mux5.5
S_FL_LED1: R22_TIA_S33.1 U13_LED_Signal_Mux5.13
S_FL_LED2: R22_TIA_S34.1 U13_LED_Signal_Mux5.14
S_TIA1: C26_TIA_S33.2 R23_TIA_S33.2 U10_TIA_S33.1 U13_TIA_Signal_Mux5.13
S_TIA2: C26_TIA_S34.2 R23_TIA_S34.2 U10_TIA_S34.1 U13_TIA_Signal_Mux5.14
SCK: P1.8 U4.7 U7_SD1.15 U7_SD2.15 U7_SD3.15 U7_SD4.15
SD_CLKIN_1: P1.18 R13_SD1.2 R13_SD2.2 R13_SD3.2 R13_SD4.2
SD_CSn1: P1.9 R14_SD1.2 U7_SD1.3
SD_CSn2: P1.7 R14_SD2.2 U7_SD2.3
SD_CSn3: P1.5 R14_SD3.2 U7_SD3.3
SD_CSn4: P1.3 R14_SD4.2 U7_SD4.3
SDOutN1: R10_LPF_N1.1 U7_SD1.10
SDOutN2: R10_LPF_N2.1 U7_SD2.10
SDOutN3: R10_LPF_N3.1 U7_SD3.10
SDOutN4: R10_LPF_N4.1 U7_SD4.10
SDOutP1: R10_LPF_P5.1 U7_SD1.11
SDOutP2: R10_LPF_P6.1 U7_SD2.11
SDOutP3: R10_LPF_P7.1 U7_SD3.11
SDOutP4: R10_LPF_P8.1 U7_SD4.11
SDSigIn1: C25_HP_FILTER1.2 R19_HP_FILTER1.2 U7_SD1.6
SDSigIn2: C25_HP_FILTER2.2 R19_HP_FILTER2.2 U7_SD2.6
SDSigIn3: C25_HP_FILTER3.2 R19_HP_FILTER3.2 U7_SD3.6
SDSigIn4: C25_HP_FILTER4.2 R19_HP_FILTER4.2 U7_SD4.6
SYNCO1: P1.17 U7_SD1.2
SYNCO2: P1.15 U7_SD2.2
SYNCO3: P1.13 U7_SD3.2
SYNCO4: P1.11 U7_SD4.2
TIA1_CH1: C26_TIA1.2 R23_TIA1.2 U10_TIA1.1 U13_TIA_Signal_Mux1.13
TIA1_CH2: C26_TIA9.2 R23_TIA9.2 U10_TIA9.1 U13_TIA_Signal_Mux2.13
TIA1_CH3: C26_TIA17.2 R23_TIA17.2 U10_TIA17.1 U13_TIA_Signal_Mux3.13
TIA1_CH4: C26_TIA25.2 R23_TIA25.2 U10_TIA25.1 U13_TIA_Signal_Mux4.13
TIA2_CH1: C26_TIA2.2 R23_TIA2.2 U10_TIA2.1 U13_TIA_Signal_Mux1.14
TIA2_CH2: C26_TIA10.2 R23_TIA10.2 U10_TIA10.1 U13_TIA_Signal_Mux2.14
TIA2_CH3: C26_TIA18.2 R23_TIA18.2 U10_TIA18.1 U13_TIA_Signal_Mux3.14
TIA2_CH4: C26_TIA26.2 R23_TIA26.2 U10_TIA26.1 U13_TIA_Signal_Mux4.14
TIA3_CH1: C26_TIA3.2 R23_TIA3.2 U10_TIA3.1 U13_TIA_Signal_Mux1.15
TIA3_CH2: C26_TIA11.2 R23_TIA11.2 U10_TIA11.1 U13_TIA_Signal_Mux2.15
TIA3_CH3: C26_TIA19.2 R23_TIA19.2 U10_TIA19.1 U13_TIA_Signal_Mux3.15
TIA3_CH4: C26_TIA27.2 R23_TIA27.2 U10_TIA27.1 U13_TIA_Signal_Mux4.15
TIA4_CH1: C26_TIA4.2 R23_TIA4.2 U10_TIA4.1 U13_TIA_Signal_Mux1.12
TIA4_CH2: C26_TIA12.2 R23_TIA12.2 U10_TIA12.1 U13_TIA_Signal_Mux2.12
TIA4_CH3: C26_TIA20.2 R23_TIA20.2 U10_TIA20.1 U13_TIA_Signal_Mux3.12
TIA4_CH4: C26_TIA28.2 R23_TIA28.2 U10_TIA28.1 U13_TIA_Signal_Mux4.12
TIA5_CH1: C26_TIA5.2 R23_TIA5.2 U10_TIA5.1 U13_TIA_Signal_Mux1.1
TIA5_CH2: C26_TIA13.2 R23_TIA13.2 U10_TIA13.1 U13_TIA_Signal_Mux2.1
TIA5_CH3: C26_TIA21.2 R23_TIA21.2 U10_TIA21.1 U13_TIA_Signal_Mux3.1
TIA5_CH4: C26_TIA29.2 R23_TIA29.2 U10_TIA29.1 U13_TIA_Signal_Mux4.1
TIA6_CH1: C26_TIA6.2 R23_TIA6.2 U10_TIA6.1 U13_TIA_Signal_Mux1.5
TIA6_CH2: C26_TIA14.2 R23_TIA14.2 U10_TIA14.1 U13_TIA_Signal_Mux2.5
TIA6_CH3: C26_TIA22.2 R23_TIA22.2 U10_TIA22.1 U13_TIA_Signal_Mux3.5
TIA6_CH4: C26_TIA30.2 R23_TIA30.2 U10_TIA30.1 U13_TIA_Signal_Mux4.5
TIA7_CH1: C26_TIA7.2 R23_TIA7.2 U10_TIA7.1 U13_TIA_Signal_Mux1.2
TIA7_CH2: C26_TIA15.2 R23_TIA15.2 U10_TIA15.1 U13_TIA_Signal_Mux2.2
TIA7_CH3: C26_TIA23.2 R23_TIA23.2 U10_TIA23.1 U13_TIA_Signal_Mux3.2
TIA7_CH4: C26_TIA31.2 R23_TIA31.2 U10_TIA31.1 U13_TIA_Signal_Mux4.2
TIA8_CH1: C26_TIA8.2 R23_TIA8.2 U10_TIA8.1 U13_TIA_Signal_Mux1.4
TIA8_CH2: C26_TIA16.2 R23_TIA16.2 U10_TIA16.1 U13_TIA_Signal_Mux2.4
TIA8_CH3: C26_TIA24.2 R23_TIA24.2 U10_TIA24.1 U13_TIA_Signal_Mux3.4
TIA8_CH4: C26_TIA32.2 R23_TIA32.2 U10_TIA32.1 U13_TIA_Signal_Mux4.4
TIASigOut1: C21_HP_FILTER1.2 U13_TIA_Signal_Mux1.3
TIASigOut2: C21_HP_FILTER2.2 U13_TIA_Signal_Mux2.3
TIASigOut3: C21_HP_FILTER3.2 U13_TIA_Signal_Mux3.3
TIASigOut4: C21_HP_FILTER4.2 U13_TIA_Signal_Mux4.3 U13_TIA_Signal_Mux5.3
pads on no net: P1.21 P1.22 U1. U1.2 U1.5
copper on no net:
  other v1: 9535,4530 9635,5025 9635,5520 9635,6015 9635,6510 9635,7005 9635,7500 9635,7995 9635,9610 9885,10105 9785,10600 9885,11095 9885,11590 9885,12085 9885,12580 9885,13075 9885,14690 9885,15185 9885,15680 9935,16175 9835,16670 9935,17165 9935,17660 9935,18155 9935,19770 9935,20265 9935,20760 9935,21255 9935,21750 9935,22245 9835,22740 9935,23235 10530,30930 10530,31425

## Text inside footprints (layer, text, board x,y; h text height)
D3_TIA1: Mechanical 1 "CUT OUT" at 8137,4386 h19.68 r90
D3_TIA2: Mechanical 1 "CUT OUT" at 8177,4881 h19.68 r90
D3_TIA3: Mechanical 1 "CUT OUT" at 8177,5376 h19.68 r90
D3_TIA4: Mechanical 1 "CUT OUT" at 8177,5871 h19.68 r90
D3_TIA5: Mechanical 1 "CUT OUT" at 8177,6366 h19.68 r90
D3_TIA6: Mechanical 1 "CUT OUT" at 8177,6861 h19.68 r90
D3_TIA7: Mechanical 1 "CUT OUT" at 8177,7356 h19.68 r90
D3_TIA8: Mechanical 1 "CUT OUT" at 8177,7851 h19.68 r90
D3_TIA9: Mechanical 1 "CUT OUT" at 8177,9466 h19.68 r90
D3_TIA10: Mechanical 1 "CUT OUT" at 8277,9961 h19.68 r90
D3_TIA11: Mechanical 1 "CUT OUT" at 8237,10456 h19.68 r90
D3_TIA12: Mechanical 1 "CUT OUT" at 8277,10951 h19.68 r90
D3_TIA13: Mechanical 1 "CUT OUT" at 8277,11446 h19.68 r90
D3_TIA14: Mechanical 1 "CUT OUT" at 8277,11941 h19.68 r90
D3_TIA15: Mechanical 1 "CUT OUT" at 8277,12436 h19.68 r90
D3_TIA16: Mechanical 1 "CUT OUT" at 8277,12931 h19.68 r90
D3_TIA17: Mechanical 1 "CUT OUT" at 8277,14546 h19.68 r90
D3_TIA18: Mechanical 1 "CUT OUT" at 8277,15041 h19.68 r90
D3_TIA19: Mechanical 1 "CUT OUT" at 8277,15536 h19.68 r90
D3_TIA20: Mechanical 1 "CUT OUT" at 8297,16031 h19.68 r90
D3_TIA21: Mechanical 1 "CUT OUT" at 8257,16526 h19.68 r90
D3_TIA22: Mechanical 1 "CUT OUT" at 8297,17021 h19.68 r90
D3_TIA23: Mechanical 1 "CUT OUT" at 8297,17516 h19.68 r90
D3_TIA24: Mechanical 1 "CUT OUT" at 8297,18011 h19.68 r90
D3_TIA25: Mechanical 1 "CUT OUT" at 8297,19626 h19.68 r90
D3_TIA26: Mechanical 1 "CUT OUT" at 8297,20121 h19.68 r90
D3_TIA27: Mechanical 1 "CUT OUT" at 8297,20616 h19.68 r90
D3_TIA28: Mechanical 1 "CUT OUT" at 8297,21111 h19.68 r90
D3_TIA29: Mechanical 1 "CUT OUT" at 8297,21606 h19.68 r90
D3_TIA30: Mechanical 1 "CUT OUT" at 8297,22101 h19.68 r90
D3_TIA31: Mechanical 1 "CUT OUT" at 8257,22596 h19.68 r90
D3_TIA32: Mechanical 1 "CUT OUT" at 8297,23091 h19.68 r90
D3_TIA_S33: Mechanical 1 "CUT OUT" at 8537,30786 h19.68 r90
D3_TIA_S34: Mechanical 1 "CUT OUT" at 8537,31281 h19.68 r90
P1: Top Overlay "19" at 8167,2185 h50 r90; Top Overlay "20" at 8003,2185 h50 r90; Top Overlay "1" at 8167,2775 h50 r90; Top Overlay "2" at 8003,2775 h50 r90; Mechanical 13 "19" at 8167,2185 h50 r90; Mechanical 13 "20" at 8003,2185 h50 r90; Mechanical 13 "1" at 8167,2775 h50 r90; Mechanical 13 "2" at 8003,2775 h50 r90